# Altium PCB Copy of FullPCB.PcbDoc
Units mil, origin at the board's own origin, x right, y up, seen from the top; angles counter-clockwise.
Board outline 5050 x 1500 mil, 2 copper layers (Top Layer, Bottom Layer); 99 components, 55 nets, 255 pads, 49 vias.
Unrouted connection lines stored in the file: 4.
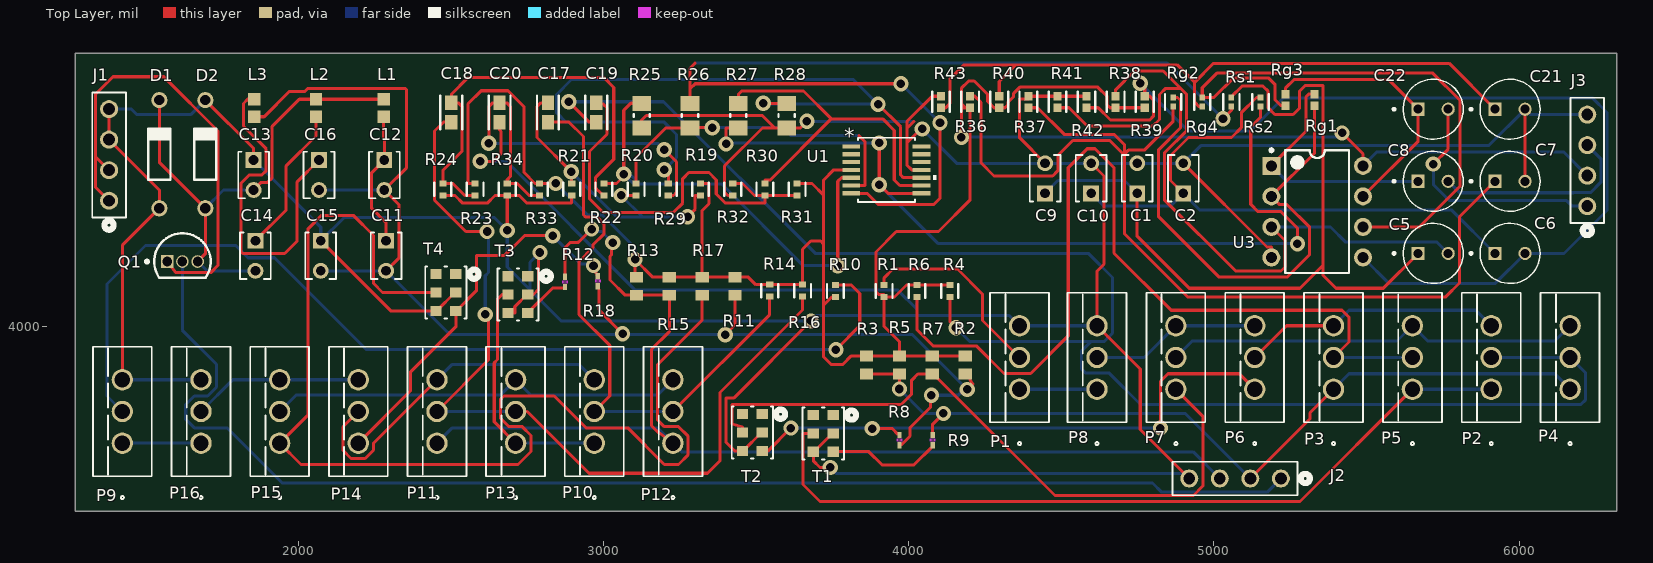
[diagram p0: Top Layer view]
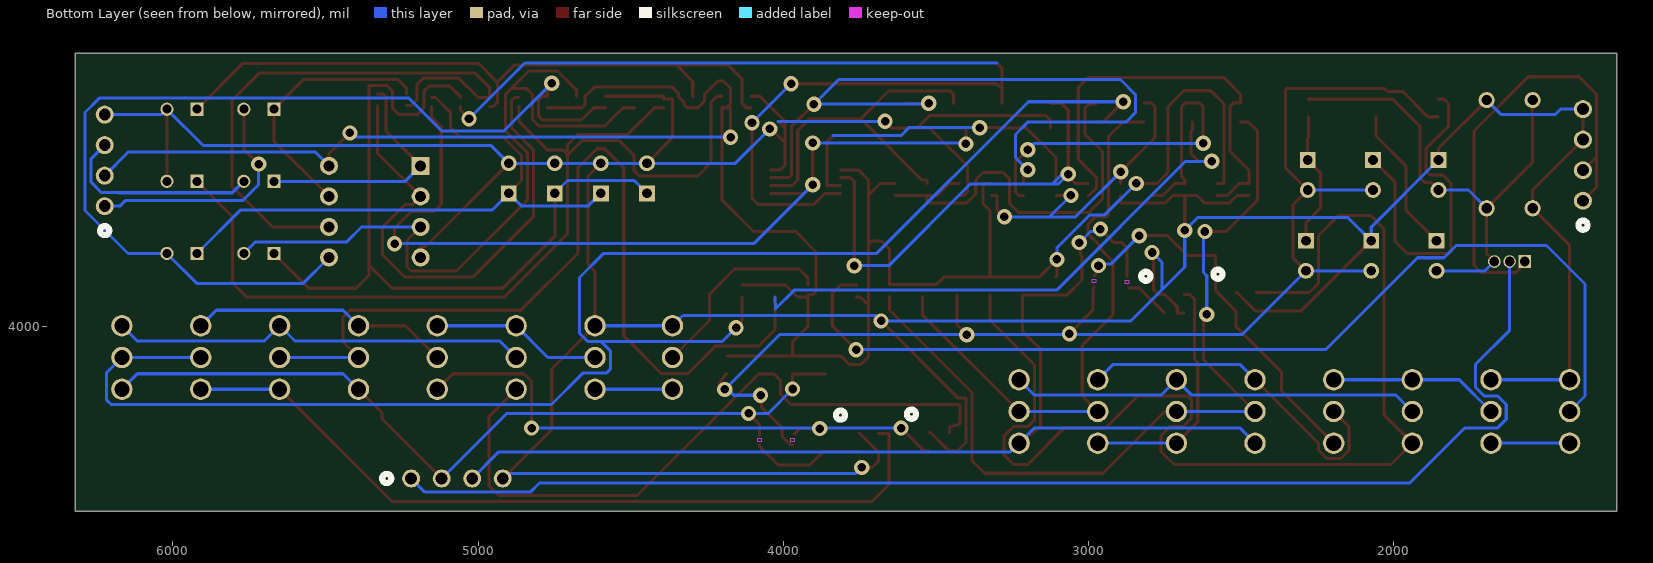
[diagram p1: Bottom Layer view, seen from below]

## Layer stack, top to bottom
Top Solder: solder mask 0.4, Solder Resist, Dk 3.5
Top Layer: signal copper 1.4
Dielectric 1: dielectric 12.6, FR-4, Dk 4.8
Bottom Layer: signal copper 1.4
Bottom Solder: solder mask 0.4, Solder Resist, Dk 3.5

## Board outline
1270,3395 1270,4895 6320,4895 6320,3395

## Design rules (kind name [scope] priority, off if disabled: settings)
Clearance [All] p1: gap=10 ignorepadtopadclearanceinfootprint=FALSE
PolygonConnect [All] p1: connectstyle=Relief reliefconductorwidth=10 reliefentries=4 polygonreliefangle="90 Angle" airgapwidth=10
RoutingVias [All] p1: holewidth=28 width=50 viastyle="Through Hole" minholewidth=28 minwidth=50 maxholewidth=28 maxwidth=50
SolderMaskExpansion [All] p1: expansion=4 istentingtop=FALSE
SupplyNets "Schematic Supply Nets" [InNet('GND')] p1: voltage=0.000
Width [All] p1: maxlimit=10 minlimit=10 preferedwidth=10
30 further rules are at their usual default settings.

## Classes and differential pairs
component class U_SeriesSwitch: Antenna Q1
component class "U_Quadrature Mixers": P1 P2 P3 P4 P5 P6 P7 P8 P9 P10 P11 P12 P13 P14 P15 P16 R1 R2 R3 R4 R5 R6 R7 R8 R9 R10 R11 R12 R13 R14 R15 R16 R17 R18 T1 T2 T3 T4
component class U_Limiter: D1 D2
component class "U_Differential Opamp": C17 C18 C19 C20 R19 R20 R21 R22 R23 R24 R25 R26 R27 R28 R29 R30 R31 R32 R33 R34 U1
component class U_Bandpass: *1 *2 *3 C11 C12 C13 C14 C15 C16 L1 L2 L3
component class "FULL HIERARCHICAL SCHEMATIC": J1 J2 J3
component class "U_Lowpass Amplifier": C1 C2 C5 C6 C7 C8 C9 C10 C21 C22 R36 R37 R38 R39 R40 R41 R42 R43 Rg1 Rg2 Rg3 Rg4 Rs1 Rs2 U3

## Components (designator, comment, footprint, x,y, rotation, side; value= is the part's Value field where it differs from the comment)
C1 "K103K10X7RF53L2" K103K10X7RF53L2_VIS 4749.02,4436.02 r90 top
C2 "K103K10X7RF53L2" K103K10X7RF53L2_VIS 4899.93,4436.02 r90 top
C5 "ECA1CM100I" CAPPRD250W50D500H1100 5718.5,4239.17 r0 top
C6 "ECA1CM100I" CAPPRD250W50D500H1100 5970.47,4239.17 r0 top
C7 "ECA1CM100I" CAPPRD250W50D500H1100 5970.47,4475.39 r0 top
C8 "ECA1CM100I" CAPPRD250W50D500H1100 5718.5,4475.39 r0 top
C9 "K103K10X7RF53L2" K103K10X7RF53L2_VIS 4447.18,4436.02 r90 top
C10 "K103K10X7RF53L2" K103K10X7RF53L2_VIS 4598.1,4436.02 r90 top
C11 "K103K10X7RF53L2" K103K10X7RF53L2_VIS 2288.39,4280.51 r270 top
C12 "K103K10X7RF53L2" K103K10X7RF53L2_VIS 2282.48,4545.28 r270 top
C13 "K103K10X7RF53L2" K103K10X7RF53L2_VIS 1854.33,4545.28 r270 top
C14 "K103K10X7RF53L2" K103K10X7RF53L2_VIS 1860.24,4280.51 r270 top
C15 "K103K10X7RF53L2" K103K10X7RF53L2_VIS 2074.31,4280.51 r270 top
C16 "K103K10X7RF53L2" K103K10X7RF53L2_VIS 2068.41,4545.28 r270 top
C17 "GRM188R60J106ME47D" FP-GRM188-0_1-e0_2_0_55-IPC_A 2818.39,4700.71 r90 top
C18 "GRM188R60J106ME47D" FP-GRM188-0_1-e0_2_0_55-IPC_A 2501.97,4700.71 r90 top
C19 "GRM188R60J106ME47D" FP-GRM188-0_1-e0_2_0_55-IPC_A 2976.59,4700.71 r90 top
C20 "GRM188R60J106ME47D" FP-GRM188-0_1-e0_2_0_55-IPC_A 2660.18,4700.71 r90 top
C21 "ECA1CM100I" CAPPRD250W50D500H1100 5970.47,4711.61 r0 top
C22 "ECA1CM100I" CAPPRD250W50D500H1100 5718.5,4711.61 r0 top
D1 "1N4148" NXP-SOD27-2_V 1545.59,4564.19 r90 top
D2 "1N4148" NXP-SOD27-2_V 1696.19,4564.19 r90 top
J1 "PRPC004SAAN-RC" CONN4_PRPC004_SUL 1380.91,4411.81 r270 top
J2 "PRPC004SAAN-RC" CONN4_PRPC004_SUL 5219.49,3501.97 r0 top
J3 "PRPC004SAAN-RC" CONN4_PRPC004_SUL 6223.43,4393.9 r270 top
L1 "BRC1608TR50M6" INDC1608X100N 2280.51,4715.55 r270 top
L2 "BRC1608TR50M6" INDC1608X100N 2059.06,4715.55 r90 top
L3 "BRC1608TR50M6" INDC1608X100N 1856.3,4715.55 r270 top
P1 "IRF9640PBF" TO220AB_VIS 4363.53,3794.29 r90 top
P2 "IRF9640PBF" TO220AB_VIS 5908.75,3794.29 r90 top
P3 "IRF9640PBF" TO220AB_VIS 5392.16,3794.29 r90 top
P4 "IRF9640PBF" TO220AB_VIS 6167.05,3794.29 r90 top
P5 "IRF9640PBF" TO220AB_VIS 5650.45,3794.29 r90 top
P6 "IRF9640PBF" TO220AB_VIS 5133.86,3794.29 r90 top
P7 "IRF9640PBF" TO220AB_VIS 4875.56,3794.29 r90 top
P8 "IRF9640PBF" TO220AB_VIS 4617.26,3794.29 r90 top
P9 "IRF9640PBF" TO220AB_VIS 1424.39,3617.52 r90 top
P10 "IRF9640PBF" TO220AB_VIS 2970.26,3617.52 r90 top
P11 "IRF9640PBF" TO220AB_VIS 2454.97,3617.52 r90 top
P12 "IRF9640PBF" TO220AB_VIS 3227.91,3617.52 r90 top
P13 "IRF9640PBF" TO220AB_VIS 2712.62,3617.52 r90 top
P14 "IRF9640PBF" TO220AB_VIS 2197.33,3617.52 r90 top
P15 "IRF9640PBF" TO220AB_VIS 1939.68,3617.52 r90 top
P16 "IRF9640PBF" TO220AB_VIS 1682.04,3617.52 r90 top
Q1 "BS170" ONSC-TO-92-3-29-11 1621.06,4212.6 r0 top
R1 "RMCF0402FT1K00" FP-RMCF0402-MFG 3919.89,4116.14 r90 top
R2 "RK73H1JTTD1002F" RESC1608X55X30ML20T10 4185.43,3874.02 r90 top
R3 "RK73H1JTTD1002F" RESC1608X55X30ML20T10 3862.41,3874.02 r90 top
R4 "RMCF0402FT1K00" FP-RMCF0402-MFG 4135.23,4116.14 r90 top
R5 "RK73H1JTTD1002F" RESC1608X55X30ML20T10 3970.08,3874.02 r90 top
R6 "RMCF0402FT1K00" FP-RMCF0402-MFG 4027.56,4116.14 r90 top
R7 "RK73H1JTTD1002F" RESC1608X55X30ML20T10 4077.76,3874.02 r90 top
R8 "TNPW020125R0BEED" RES_TNPW0201_VIS 3969.96,3627.89 r90 top
R9 "TNPW020125R0BEED" RES_TNPW0201_VIS 4078.74,3627.89 r90 top
R10 "RMCF0402FT1K00" FP-RMCF0402-MFG 3760.35,4116.14 r90 top
R11 "RK73H1JTTD1002F" RESC1608X55X30ML20T10 3431.49,4131.89 r90 top
R12 "TNPW020125R0BEED" RES_TNPW0201_VIS 2874.48,4145.63 r90 top
R13 "RK73H1JTTD1002F" RESC1608X55X30ML20T10 3108.47,4131.89 r90 top
R14 "RMCF0402FT1K00" FP-RMCF0402-MFG 3545.01,4117.13 r90 top
R15 "RK73H1JTTD1002F" RESC1608X55X30ML20T10 3216.15,4131.89 r90 top
R16 "RMCF0402FT1K00" FP-RMCF0402-MFG 3652.68,4117.13 r90 top
R17 "RK73H1JTTD1002F" RESC1608X55X30ML20T10 3323.82,4131.89 r90 top
R18 "TNPW020125R0BEED" RES_TNPW0201_VIS 2982.16,4148.39 r90 top
R19 "RMCF0402JT100K" FP-RMCF0402-MFG 3318.34,4448.82 r90 top
R20 "RMCF0402FT1K00" FP-RMCF0402-MFG 3107.34,4448.82 r90 top
R21 "RMCF0402JT100K" FP-RMCF0402-MFG 2896.34,4448.82 r90 top
R22 "RMCF0402FT1K00" FP-RMCF0402-MFG 3001.84,4448.82 r90 top
R23 "RMCF0402JT100K" FP-RMCF0402-MFG 2579.85,4448.82 r90 top
R24 "RMCF0402JT100K" FP-RMCF0402-MFG 2474.35,4448.82 r90 top
R25 "CRCW08055K00FKTA" RESC2013X50X30ML20T20 3125.77,4690.7 r90 top
R26 "CRCW08055K00FKTA" RESC2013X50X30ML20T20 3283.98,4690.7 r90 top
R27 "CRCW08055K00FKTA" RESC2013X50X30ML20T20 3442.18,4690.7 r90 top
R28 "CRCW08055K00FKTA" RESC2013X50X30ML20T20 3600.39,4690.7 r90 top
R29 "RMCF0402FT1K00" FP-RMCF0402-MFG 3212.84,4448.82 r90 top
R30 "RMCF0402FT1K00" FP-RMCF0402-MFG 3529.34,4448.82 r90 top
R31 "RMCF0402JT100K" FP-RMCF0402-MFG 3634.84,4448.82 r90 top
R32 "RMCF0402JT100K" FP-RMCF0402-MFG 3423.84,4448.82 r90 top
R33 "RMCF0402JT100K" FP-RMCF0402-MFG 2790.84,4448.82 r90 top
R34 "RMCF0402JT100K" FP-RMCF0402-MFG 2685.35,4448.82 r90 top
R36 "RC0402JR-07100KL" FP-RC0402-0_4-IPC_A 4201.65,4735.24 r90 top
R37 "RC0402JR-07100KL" FP-RC0402-0_4-IPC_A 4392.35,4735.24 r90 top
R38 "RC0402JR-07100KL" FP-RC0402-0_4-IPC_A 4678.4,4735.24 r90 top
R39 "RC0402JR-07100KL" FP-RC0402-0_4-IPC_A 4773.75,4735.24 r90 top
R40 "RC0402JR-07100KL" FP-RC0402-0_4-IPC_A 4297,4735.24 r90 top
R41 "RC0402JR-07100KL" FP-RC0402-0_4-IPC_A 4487.7,4735.24 r90 top
R42 "RC0402JR-07100KL" FP-RC0402-0_4-IPC_A 4583.05,4735.24 r90 top
R43 "RC0402JR-07100KL" FP-RC0402-0_4-IPC_A 4106.3,4735.24 r90 top
Rg1 "RC0402FR-07330KL" RESC1005X40X25ML05T10 5329.72,4742.13 r90 top
Rg2 "RC0402JR-0710KL" FP-RC0402-0_4-IPC_C 4866.69,4735.24 r90 top
Rg3 "RC0402FR-07330KL" RESC1005X40X25ML05T10 5234.37,4742.13 r90 top
Rg4 "RC0402JR-0710KL" FP-RC0402-0_4-IPC_C 4962.04,4735.24 r90 top
Rs1 "RC0402JR-0710KL" FP-RC0402-0_4-IPC_C 5057.39,4735.24 r90 top
Rs2 "RC0402JR-0710KL" FP-RC0402-0_4-IPC_C 5152.74,4735.24 r90 top
T1 "UWB1-85EC" UWB1UWB2_COC 3720.49,3649.57 r0 top
T2 "UWB1-85EC" UWB1UWB2_COC 3488.25,3652.56 r0 top
T3 "UWB1-85EC" UWB1UWB2_COC 2720.39,4104.41 r0 top
T4 "UWB1-85EC" UWB1UWB2_COC 2484.23,4111.22 r0 top
U1 "OPA4863PWR" PW14_TEX 3927.32,4512.8 r0 top
U3 "LT1638CN8#PBF" LT-N8-8 5338.58,4375.98 r0 top

## Footprints (in the part's own frame and the unit in brackets; to place one, negate y for a bottom-side part, rotate by r counter-clockwise, add the part's x,y. Pads: shape width x height; smd on the part's side, far side on the other; paste and mask are expansions set on the pad)
CAPPRD250W50D500H1100 [mm]
  round 1.1 hole 0.75: N(1.25,0)
  rect 1.1x1.1 hole 0.75: P(-1.25,0)
  silkscreen extent -3.35,-2.5 2.5,2.5, body extent -2.5,-2.5 2.5,2.5, height 11
CONN4_PRPC004_SUL [mil]
  round 59 / inner round 60 / far side round 59 hole 39 paste-99999 mask+0: 1(0,0) 2(-100,0) 3(-200,0) 4(-300,0)
  silkscreen extent -355,-55 95,55
FP-GRM188-0_1-e0_2_0_55-IPC_A [mil]
  rect 47.57x39.85 smd paste+0 mask+0: 1(-31.57,0) 2(31.57,0)
  silkscreen extent -55,-36 55,36, body extent -75,-40 75,40, height 10
FP-RC0402-0_4-IPC_A [mil]
  rect 28.16x26.48 smd paste+0 mask+0: 1(-18.84,0) 2(18.84,0)
  silkscreen extent -33,-29 33,29, body extent -41,-21 41,21, height 10
FP-RC0402-0_4-IPC_C [mil]
  rect 20.29x18.6 smd paste+0 mask+0: 1(-14.9,0) 2(14.9,0)
  silkscreen extent -25,-27 25,27, body extent -29,-15 29,15, height 10
FP-RMCF0402-MFG [mm]
  rect 0.5x0.6 smd paste+0 mask+0: 1(-0.5,0) 2(0.5,0)
  silkscreen extent -0.55,-0.7 0.55,0.7, body extent -0.85,-0.4 0.85,0.4, height 0.25
INDC1608X100N [mm]
  rect 1.06x1.02 smd: 1(-0.728,0) 2(0.728,0)
K103K10X7RF53L2_VIS [mil]
  rect 52x52 / inner round 60 / far side rect 52x52 hole 32 paste-99999 mask+0: 1(0,0)
  round 52 / inner round 60 / far side round 52 hole 32 paste-99999 mask+0: 2(98.42,0)
  silkscreen extent -27,-51 125,50, body extent -33,-46 109,46, height 142
LT-N8-8 [mm] "DIP, 8-Leads, Body 10.16x6.48mm, Pitch 2.54mm"
  rect 1.5x1.5 hole 0.9: 1(-3.81,3.81)
  round 1.5 hole 0.9: 2(-3.81,1.27) 3(-3.81,-1.27) 4(-3.81,-3.81) 5(3.81,-3.81) 6(3.81,-1.27) 7(3.81,1.27) 8(3.81,3.81)
  silkscreen extent -3.93,-5.1 2.65,5.23, body extent -3.95,-5.07 3.95,5.07, height 3.94
NXP-SOD27-2_V [mm] "SOD27, 2-Leads, Dia 1.85mm, Body Length 4.25mm, Pin Spacing 9mm"
  round 1.35 hole 0.85: 1(-4.5,0) 2(4.5,0)
  silkscreen extent -2.12,-0.93 2.12,0.92, body extent -4.78,-0.92 4.78,0.92, height 1.84
ONSC-TO-92-3-29-11 [mm] "TO, 3-Leads, Body Dia 4.7mm, Pitch 1.27mm"
  rect 1.05x1.05 hole 0.8: 1(-1.27,0)
  round 1.05 hole 0.8: 2(0,0) 3(1.27,0)
  silkscreen extent -3.07,-1.34 2.35,2.35, body extent -2.35,-1.33 2.36,2.36, height 7.87
PW14_TEX [mil]
  rect 58x14 smd paste+0 mask+0: 1(-115,76.77) 2(-115,51.18) 3(-115,25.59) 4(-115,0) 5(-115,-25.59) 6(-115,-51.18) 7(-115,-76.77) 8(115,-76.77) 9(115,-51.18) 10(115,-25.59) 11(115,0) 12(115,25.59) 13(115,51.18) 14(115,76.77)
  silkscreen extent -94,-105 164,106, body extent -130,-101 130,101, height 47
RES_TNPW0201_VIS [mil]
  rect 21x14 smd paste+0 mask+0: 1(-16.5,0) 2(16.5,0)
  Top Layer keep-out region: -4,-5 -4,5 4,5 4,-5
  Keep-Out Layer region: -4,-7 -4,7 4,7 4,-7
  body extent -13,-7 13,7, height 10
RESC1005X40X25ML05T10 [mm] "Chip Resistor, 2-Leads, Body 1.00x0.50mm, IPC Low Density"
  rect 0.7x0.65 smd: 1(-0.475,0) 2(0.475,0)
  body extent -0.53,-0.27 0.53,0.28, height 0.4
RESC1608X55X30ML20T10 [mm] "Chip Resistor, 2-Leads, Body 1.60x0.80mm, IPC Low Density"
  rect 0.9x1.1 smd: 1(-0.75,0) 2(0.75,0)
  body extent -0.9,-0.5 0.9,0.5, height 0.55
RESC2013X50X30ML20T20 [mm] "Chip Resistor, 2-Leads, Body 2.00x1.25mm, IPC Low Density"
  rect 1.25x1.55 smd: 1(-1.025,0) 2(1.025,0)
  silkscreen extent -0.1,-0.67 0.1,0.67, body extent -1.1,-0.72 1.1,0.72, height 0.5
TO220AB_VIS [mil]
  round 70 / inner round 60 / far side round 70 hole 50 paste-99999 mask+0: 1(0,0) 2(103.94,0) 3(207.87,0)
  silkscreen extent -183,-96 316,97, body extent -103,-91 311,91, height 600
UWB1UWB2_COC [mil]
  rect 37x33 smd paste+0 mask+0: 1(32.5,60) 2(32.5,0) 3(32.5,-60) 4(-32.5,-60) 5(-32.5,0) 6(-32.5,60)
  silkscreen extent -68,-85 108,85

## Part data
C1 C2 C9 C10 C11 C12 C13 C14 C15 C16 P1 P2 P3 P4 P5 P6 P7 P8 P9 P10 P11 P12 P13 P14 P15 P16: "No Description Available", Mfr_Name=Vishay
  C1 C2 C9 C10 C11 C12 C13 C14 C15 C16: Type="Ceramic Capacitor"
C5 C6 C7 C8 C21 C22: "10ÂµF 16V Aluminum Electrolytic Capacitors Radial, Can 2000 Hrs @ 85Â°C", Package="RADIAL-2 Panasonic", Check_prices=https://www.snapeda.com/parts/ECA1CM100I/Panasonic/view-part/?ref=eda, Digi-Key_Part_Number=P19513TB-ND, MF=Panasonic, MP=ECA1CM100I, SnapEDA_Link=https://www.snapeda.com/parts/ECA1CM100I/Panasonic/view-part/?ref=snap
C17 C18 C19 C20: library part CMP-2006-02792-2, "Chip Multilayer Ceramic Capacitors for General Purpose, 0603, 10uF, X5R, 15%, 20%, 6.3V", Capacitance=10uF, Case Code (Imperial)=0603, Case Code (Metric)=1608, Dielectric=X5R, Max Operating Temperature=85°C, Min Operating Temperature=-55°C, Package Quantity=4000, Tolerance=20%, Voltage=6.3V, Case/Package=0603, Depth=0.8mm, Height=0.8mm, Lead Free="Lead Free", Length=1.6mm, Material=Ceramic, Mount="Surface Mount", Packaging="Tape and Reel", Radiation Hardening=No, REACH SVHC="No SVHC", Termination=SMD/SMT, Thickness=0.035inch, Voltage Rating=6.3V, Voltage Rating (DC)=6.3V, Width=0.031inch
D1 D2: library part CMP-0648-00002-1, "High-speed Diode, 100 V, 450 mA, 2-Pin SOD27, RoHS", Manufacturer="NXP Semiconductors", Cd="4 pF Max.", ComponentLink1Description="Manufacturer URL", ComponentLink1URL=http://www.nxp.com/, ComponentLink2Description=Datasheet, ComponentLink2URL=http://www.nxp.com/documents/data_sheet/1N4148_1N4448.pdf, ComponentLink3Description="Package Specification", ComponentLink3URL=http://www.nxp.com/documents/data_sheet/1N4148_1N4448.pdf, Configuration=Single, DatasheetVersion=Aug-04, IF="200 mA Max.", IFRM="450 mA", IFSM="4 A Max.", IR (VR="20 V)=25 nA", Mounting Technology="Through Hole", PackageDescription="2-Pin Hermetically Sealed Glass Package, Axial Leaded, Dia 1.85 mm, Body Length 4.25 mm, Lead Spread 25.4 mm", PackageReference=SOD27, PackageVersion=Aug-04, PartNumber=1N4148, RoHS=TRUE, Trr="4 ns Max.", VF (IF="10 mA)=1 V", VR="100 V Max."
J1 J2 J3: "No Description Available", Mfr_Name=Sullins, RefDes=RefDes, Type="Headers, Male Pins"
L1 L2 L3: "Inductor Power Chip Wirewound 500nH 20% 6MHz Ferrite 1.05A 117mOhm DCR 0603 T/R", Package=None, Availability=Unavailable, MP=BRC1608TR50M6, Price=None
Q1: library part CMP-1058-00929-1, "Small Signal MOSFET, 500 mA, 60 V, N-Channel, 3-Pin TO-92, Bulk Box", Manufacturer="On Semiconductor", Package Type=TO-92, Channel Polarity="N Channel", ComponentLink1Description="Manufacturer URL", ComponentLink1URL=http://www.onsemi.com/, ComponentLink2Description=Datasheet, ComponentLink2URL=http://www.onsemi.com/pub_link/Collateral/BS170-D.PDF, ComponentLink3Description="Package Specification", ComponentLink3URL=http://www.onsemi.cn/pub_link/Collateral/2N6426-D.PDF, Configuration=Single, DatasheetVersion="Rev. 6", ID Max (A)=0.5, Mounting Technology="Through Hole", PackageDescription="3-Pin Transistor Outline, Body 4.825 x 3.685 mm, Pitch 1.27 mm", PackageReference=TO-92-3-29-11_AM_SL, PackageVersion="Rev. AM", Packing="Bulk Box", PartNumber=BS170, PD Max (W)=0.35, V(BR)DSS Min (V)=60, VGS Max (V)=20, VGS(th) Max (V)=3
R1 R4 R6 R10 R14 R16 R20 R22 R29 R30: library part CMP-26527-000026-1, "1kΩ ±1% 0.063W 0402 Thick Film Chip Resistor AEC-Q200 compliant", Case Code (Imperial)=0402, Case Code (Metric)=1005, Max Operating Temperature=155°C, Max Power Dissipation=63mW, Min Operating Temperature=-55°C, Resistance=1kR, Resistor Type="Thick Film", Temperature Coefficient=100ppm/°C, Tolerance=1%, Case/Package=0402, Construction=Rectangular, Contact Plating=Tin, Depth=0.5mm, Features="Automotive AEC-Q200", Height=0.016inch, Lead Free="Lead Free", Length=1mm, Military Standard=Not, Mount="Surface Mount", Number of Terminations=2, Packaging="Tape and Reel", Power Rating=63mW, Radiation Hardening=No, RoHS Compliant=Yes, Series=RMCF, Size Code=0402, Width=0.02inch
R2 R3 R5 R7 R11 R13 R15 R17: library part CMP-2000-01099-1, Manufacturer="KOA Speer", Part Number=RK73H1JTTD1002F
R8 R9 R12 R18: "RES 25 OHM 0.1% 0.075W 0201", Mfr_Name=Vishay
R19 R21 R23 R24 R31 R32 R33 R34: library part CMP-26527-006953-1, "100kΩ ±5% 0.063W 0402 Thick Film Chip Resistor AEC-Q200 compliant", Case Code (Imperial)=0402, Case Code (Metric)=1005, Max Operating Temperature=155°C, Max Power Dissipation=63mW, Min Operating Temperature=-55°C, Power Rating=62.5mW, Resistance=100kR, Resistor Type="Thick Film", Temperature Coefficient=100ppm/°C, Tolerance=5%, Working Voltage=50V, Case/Package=0402, Construction=Rectangular, Contact Plating=Tin, Depth=0.5mm, Features="Automotive AEC-Q200", Height=0.016inch, Lead Free="Lead Free", Length=1mm, Military Standard=Not, Mount="Surface Mount", Number of Terminations=2, Packaging="Tape and Reel", Radiation Hardening=No, RoHS Compliant=Yes, Series=RMCF, Technology="THICK FILM", Width=0.02inch
R25 R26 R27 R28: library part CMP-2001-04239-1, Manufacturer="Vishay Dale", Part Number=CRCW08055K00FKTA
R36 R37 R38 R39 R40 R41 R42 R43: library part CMP-2002-07913-2, "RES 100K OHM 5% 1/16W 0402", Case Code (Imperial)=0402, Case Code (Metric)=1005, Max Operating Temperature=155°C, Max Power Dissipation=63mW, Min Operating Temperature=-55°C, Package Quantity=1, Resistance=100kR, Resistance Tolerance=5%, Resistor Type="Thick Film", Temperature Coefficient=100ppm/°C, Voltage Rating=50V, Case/Package=0402, Construction=Rectangular, Depth=0.5mm, Features="Moisture Resistant", Height=0.016inch, Lead Free="Lead Free", Length=1mm, Military Standard=Not, Number of Terminations=2, Packaging="Tape and Reel", Power Rating=63mW, RoHS Compliant=Yes, Series=RC, Size Code=0402, Termination=SMD/SMT, Tolerance=5%, Width=0.02inch
Rg1 Rg3: library part CMP-2002-07612-1, Manufacturer="Yageo / Phycomp", Part Number=RC0402FR-07330KL
Rg2 Rg4 Rs1 Rs2: library part CMP-2002-07915-3, "RES 10K OHM 5% 1/16W 0402", Case Code (Imperial)=0402, Case Code (Metric)=1005, Max Operating Temperature=155°C, Max Power Dissipation=63mW, Min Operating Temperature=-55°C, Package Quantity=1, Power Rating=62.5mW, Resistance=10kR, Resistance Tolerance=5%, Resistor Type="Thick Film", Temperature Coefficient=100ppm/°C, Voltage Rating=50V, Case/Package=0402, Construction=Rectangular, Depth=0.5mm, Features="Moisture Resistant", Height=0.016inch, Lead Free="Lead Free", Length=0.039inch, Military Standard=Not, Number of Terminations=2, Packaging="Tape and Reel", RoHS Compliant=Yes, Series=RC, Size Code=0402, Termination=SMD/SMT, Tolerance=5%, Width=0.02inch
T1 T2 T3 T4: "• 3 dB bandwidth: 1 MHz to 8.5 GHz • 1/4 Watt RF input power • 250 mA max current rating • AEC-Q200 Grade 1 (–40°C to +125°C)", Mfr_Name=Coilcraft, RefDes=RefDes, Type=Type
U1: "No Description Available", Mfr_Name="Texas Instruments", RefDes=RefDes, Type=Linear
U3: library part CMP-0359-01111-2, "Dual Channel, High Voltage, Micropower Rail-to-Rail Operational Amplifier, 1.2 MHz Typical GBW, 0.38 V/us Typical SR, 2.2 to 44 V, 8-Pin DIP (N8-8), Commercial, Pb-Free", Linear Technology Part Number=LT1638, Manufacturer="Linear Technology", Channels (#)=2, ComponentLink1Description="Manufacturer URL", ComponentLink1URL=http://www.linear.com/, ComponentLink2Description=Datasheet, ComponentLink2URL=http://cds.linear.com/docs/en/datasheet/16389fg.pdf, ComponentLink3Description="Package Specification", ComponentLink3URL=http://cds.linear.com/docs/en/packaging/05081510_I_N8.pdf, DatasheetVersion="Rev. G", GBW (MHz) Typical=1.2, Is (mA) Typical=0.17, Mounting Technology="Surface Mount", PackageDescription="8-Lead PDIP, Body 10.16 x 6.48 mm, Pitch 2.54 mm", PackageReference=LT-N8-8, PackageVersion="Rev I", PartNumber=LT1638CN8#PBF, RevisionNote="URLs updated", RoHS=Pb-Free, SR (V/us) Typical=0.38, Type=VFB, Vos (mV) Guaranteed=0.6, Vos (mV) Typical=0.2, Vs Max (V)=44, Vs Min (V)=2.2

## Via types
v1: diameter 50, hole 28, Top Layer to Bottom Layer, 49 vias

## Nets (pads, with @x,y where several pads share a name; then routed paths per layer and width w, separated by ;. In a path a pad name is that pad's centre, name@x,y a point inside that pad or via, vN(x,y) a via of type N, cw(c..) or ccw(c..) an arc to the next point about the centre after c; other vN are vias at no path point)
5V: J3.2 R1.1 R2.2 R3.2 R4.2 R5.2 R6.2 R7.2 R10.1 R11.2 R13.2 R14.2 R15.2 R16.2 R17.2 R19.2 R23.2 R31.2 R33.2 R36.1 R38.1 R39.1 R40.1 U1.4 U3.8 | length 8152.3
  Top Layer w10: R23.2 2557,4468.5 2557,4729 2600,4772 2688,4772 2740,4720 2740,4505 2776.5,4468.5 R33.2 v1(2844.5,4468.5) ; R13.2 3104,4165.89 v1(3104,4219.42) 3162,4161.42 R15.2 R17.2 ; R19.2 3346,4468.5 3346,4402.18 3323.82,4380 R17.2 ; R31.2 3683.5,4468.5 3722,4430 ; R10.1 3748.46,4096.46 3722,4070 ; U1.4 3754.8,4512.8 3722,4480 3722,4430 ; R4.2 R6.2 3993.37,4135.83 3954,4096.46 R1.1 ; v1(4173,4620) 4173,4716.4 4186.6,4716.4 ; R2.2 R7.2 R5.2 ; R39.1 R38.1 4660,4716.4 4649.29,4727.1 4649.29,4754.71 4620,4784 4364.55,4784 4344.11,4763.56 4344.11,4753.11 4325,4734 4325,4725.4 4316,4716.4 R40.1 4280,4716.4 4259,4737.4 4259,4760 4215,4804 4197,4804 4173,4780 4173,4730 4186.6,4716.4 ; v1(5420,4634) 5488.58,4565.42 U3.8 ; R17.2 R11.2 3475,4161.42 3499.61,4136.81 R14.2 R16.2 3652.68,4252.36 3680,4279.68 3712,4279.68 3722,4269.68 ; 3722,4070 3722,3900 3746,3876 3785,3876 3812.54,3903.54 R3.2 R5.2 ; 3722,4070 3722,4269.68 ; 3722,4269.68 3722,4430 ; R1.1 3919.89,4000 3970.08,3949.8 R5.2 ; R1.1 3919.89,4104 3903,4104 3893.08,4113.92 3893.08,4244.08 3960,4311 4098,4311 4201.65,4414.65 R36.1 4186.6,4716.4
  Bottom Layer w10: v1(2844.5,4468.5) 2948.59,4364.41 2997.34,4364.41 3104,4257.74 v1(3104,4219.42) v1@3104,4209 ; v1(4173,4620) 5406,4620 v1(5420,4634) ; U3.8 5534.65,4572.05 6145.28,4572.05 J3.2
GND: C1.2 C2.2 C7.N C9.2 C10.2 C13.1 C15.1 C21.N D1.1 D2.2 J1.3 J1.4 J2.4 J3.4 P1.3 P8.3 P9.3 P16.3 R21.1 R24.1 R25.1 R28.1 R32.1 R34.1 R37.2 R41.2 R42.2 R43.2 T1.2 T1.4 T2.2 T2.4 T3.2 T3.4 T4.2 T4.4 U1.11 U3.4 | length 15015.4
  Top Layer w10: J1.4 J1.3 1545.59,4447.13 D1.1 1424.39,4265.83 P9.3 ; D2.2 1854.33,4583.21 C13.1 ; C15.1 2303.6,4051.22 T4.4 2454,4051.22 2514,4111.22 T4.2 ; R24.1 2513.87,4429.13 2539,4404 2619.87,4404 2645,4429.13 R34.1 ; v1(2685.35,4314.65) R34.1 ; T3.4 2709.81,4044.41 2709.81,4064.22 2750,4104.41 T3.2 2771.41,4104.41 2787,4120 2787,4236.8 v1(2792.32,4242.13) ; R21.1 2896.34,4404 2750,4404 2724.87,4429.13 R34.1 ; R25.1 3125.77,4676 3140.77,4691 3521,4691 3561.66,4650.34 ; R32.1 3407.87,4429.13 3397,4440 3397,4526 3521.34,4650.34 3561.66,4650.34 ; T2.2 3518,3652.56 3458,3592.56 T2.4 3429.69,3592.56 3402.25,3620 3402.25,3765 3427,3765 v1(3680,4018) ; v1(3667,4672) 3645.34,4650.34 R28.1 3561.66,4650.34 ; v1(3743,3538) 3709.99,3538 3687.99,3560 T1.4 3690,3589.57 3750,3649.57 T1.2 ; 4018,4672 3994.96,4648.96 ; U1.11 4010,4512.8 3994.96,4527.83 3994.96,4601.85 ; v1(4045.11,4646.89) 4040,4646.89 3994.96,4601.85 ; R43.2 4077.08,4754.08 3994.96,4671.96 3994.96,4648.96 ; C9.2 4364,4617.63 4364,4745.48 4392.35,4745.48 R37.2 R41.2 R42.2 ; C10.2 4640,4492.55 4640,4204 4617.26,4181.26 P8.3 4759,3860.43 4759,3662.46 J2.4 ; C2.2 5174.38,4260 5188.58,4260 U3.4 ; C7.N C21.N ; 3994.96,4601.85 3994.96,4648.96
  Bottom Layer w10: J1.4 1454.19,4711.81 1471,4695 1649.83,4695 D2.2 ; P9.3 P16.3 ; C13.1 2074.31,4325.29 C15.1 2150.8,4357 2643,4357 v1(2685.35,4314.65) 2685.35,4194.65 2760,4120 ; v1(2792.32,4242.13) 2760,4209.8 2760,4120 ; v1(3667,4672) 4018,4672 ; v1(3743,3538) 3763,3518 4919.49,3518 J2.4 ; v1(4045.11,4646.89) 4157.55,4534.45 C9.2 C10.2 C1.2 C2.2 4958.92,4593.43 5901.5,4593.43 C21.N 6037.4,4693.9 J3.4 ; P8.3 P1.3 4329.69,4036 3698,4036 v1(3680,4018) 2862,4018 2760,4120
LO_F1_90: J2.2 P3.1 P4.1 R3.1 R5.1 R9.2 | length 2735.4
  Top Layer w10: R3.1 R5.1 v1(3970.08,3795) ; R9.2 4078.74,3679.57 v1(4114.17,3715) ; J2.2 5315,3697.48 5315,3717.14 P3.1
  Bottom Layer w10: v1(3970.08,3795) 4050.08,3715 v1(4114.17,3715) 4906.46,3715 J2.2 ; P3.1 5442.86,3845 6116.34,3845 P4.1
LO_FI_0: J2.3 P11.1 P12.1 R12.2 R13.1 R15.1 | length 3832.3
  Top Layer w10: R12.2 2874.48,4257.36 2892.58,4275.46 2918.11,4275.46 2925.77,4283.11 v1(2961.54,4318.88) ; v1(3030.48,4274.7) 3027.06,4271.29 3027.06,4234.7 3022.06,4229.7 3022.06,4152.12 3071.82,4102.36 R13.1 R15.1 3216.15,3983 3157.91,3924.76 3157.91,3674.75 3180,3652.66 P12.1
  Bottom Layer w10: P11.1 2505.45,3668 3177.43,3668 P12.1 3256.43,3589 4932.46,3589 J2.3 ; v1(2961.54,4318.88) 2969.19,4311.23 2993.94,4311.23 v1(3030.48,4274.7)
Low_Pass_0Deg: C5.N R38.2 R41.1 U3.3 | length 2476.4
  Top Layer w10: R41.1 4525.73,4716.4 4586.06,4656.07 4800,4656.07 4821.99,4678.06 4821.99,4760 4841.99,4780 4891,4780 ; R38.2 4678.4,4775.4 4740,4837 4834,4837 4891,4780 ; U3.3 5233.11,4281.46 5233.11,4194.57 5220,4181.46 5071.54,4181.46 4838,4415 4838,4568.29 4911,4641.29 4911,4760 4891,4780
  Bottom Layer w10: U3.3 5382.02,4325.98 5432,4276 5730.89,4276 C5.N
Low_Pass_90Deg: C6.N R39.2 R42.1 U3.5 | length 3291.3
  Top Layer w10: R42.1 4620.92,4716.4 4661.25,4676.07 4790,4676.07 4801.99,4688.06 4801.99,4742.09 4790,4754.08 R39.2 4773.75,4782.25 v1(4759,4797)
  Bottom Layer w10: v1(4759,4797) 4916,4640 5119,4640 5228,4749 6240,4749 6287.93,4701.07 6287.93,4379.93 6147.17,4239.17 C6.N 5920.51,4140 5574.57,4140 U3.5
NetC1_1: C1.1 C5.P C9.1 Rs1.2 | length 2645.5
  Top Layer w10: C1.1 4749.02,4294.98 4919,4125 5282.52,4125 5357.52,4200 ; Rs1.2 5057.39,4752.39 5092,4787 5161,4787 5178,4770 5178,4716 5200,4694 5260,4694 5280,4714 5280,4769.61 5300,4789.61 5357.52,4789.61 5357.52,4200 ; C5.P 5555.12,4125 5400,4125 5357.52,4167.48 5357.52,4200
  Bottom Layer w10: C9.1 4489.15,4478 4707.04,4478 C1.1
NetC2_1: C2.1 C6.P C10.1 Rs2.2 | length 1982.2
  Top Layer w10: C2.1 4858,4477.96 4858,4560 4916.94,4618.94 5057.77,4618.94 5090,4651.17 5090,4700.14 5140,4750.14 Rs2.2
  Bottom Layer w10: C10.1 4639.12,4395 4858.91,4395 C2.1 4954.96,4381 5779.43,4381 C6.P
NetC7_P: C7.P R36.2 R37.1 Rg2.1 | length 3319.4
  Top Layer w10: R36.2 4216.92,4754.08 4237,4734 4237,4536 4280,4493 4472,4493 4489,4510 4489,4560 4538,4609 4659,4609 4708,4560 ; R37.1 4422.6,4716.4 4509.69,4629.31 4673,4629.31 4708,4594.31 4708,4565.31 ; Rg2.1 4866.69,4672.02 4771.99,4577.31 4720,4577.31 4708,4565.31 ; C7.P 5805,4359.13 5805,4142 5760,4097 4914,4097 4708,4303 4708,4560 ; 4708,4560 4708,4565.31
NetC8_P: C8.P Rg1.2 U3.1 | length 806.2
  Top Layer w10: U3.1 5301.93,4639.33 5301.93,4752.21 5310.55,4760.83 Rg1.2
  Bottom Layer w10: U3.1 5239.17,4475.39 C8.P
NetC11_1: C11.1 C12.1 L1.2 | length 444
  Top Layer w10: L1.2 2280.51,4616.97 2282.48,4615 C12.1 2241,4503.8 2241,4387 2288.39,4339.61 C11.1
NetC11_2: C11.2 C12.2 C15.2 C16.2 L3.2 R2.1 R8.1 R11.1 R18.1 | length 4428.3
  Top Layer w10: L3.2 1889,4686.89 1972.11,4770 2022.69,4770 2032.76,4780.08 2349.76,4780.08 2355.61,4774.22 2355.61,4519.98 C12.2 2330,4399.33 2330,4223.7 C11.2 ; R18.1 2982.16,4128.39 2984.16,4126.39 2984.16,4122.14 2985.77,4120.53 2985.77,4055.57 2986.22,4055.12 2986.22,4053.15 v1(3062.99,3976.38) ; v1(3399.49,3973) 3431.49,4005 R11.1 ; R8.1 3977.67,3613.39 4004.78,3640.49 4004.78,3668.16 4071.22,3734.61 4071.22,3771.02 v1(4074.8,3774.61) ; R2.1 4189.37,3844.49 4210.75,3811.75 v1(4192.5,3793.5)
  Bottom Layer w10: C16.2 C12.2 ; C15.2 C11.2 2497.47,3973 v1(3399.49,3973) 4013,3973 v1(4192.5,3793.5) 4181.68,3793.5 4162.78,3774.61 v1(4074.8,3774.61)
NetC13_2: C13.2 C14.2 D1.2 D2.1 L1.1 L2.2 Q1.3 | length 1634.1
  Top Layer w10: D1.2 1545.59,4537.62 D2.1 1696.19,4237.72 Q1.3 ; C13.2 1879.42,4471.94 1900,4471.94 1915.33,4487.27 1915.33,4655.33 2004.21,4744.21 L2.2 L1.1
  Bottom Layer w10: Q1.3 1701.58,4182.09 C14.2 ; D2.1 1756.01,4446.85 C13.2
NetC14_1: C14.1 L2.1 | length 488.7
  Top Layer w10: C14.1 1961,4381.28 1961,4525.94 2059.06,4624 L2.1
NetC16_1: C16.1 L3.1 | length 1113.6
  Top Layer w10: L3.1 1835.21,4744.21 1821,4730 1821,4656 1895.33,4581.67 1895.33,4510 1881.33,4496 1840,4496 1813,4469 1813,4245 1819,4239 1956,4239 1997,4280 1997,4473.87 C16.1
NetC17_1: C17.1 P10.2 P12.2 R14.1 | length 1947.4
  Top Layer w10: C17.1 2887.86,4669.14 2935.03,4621.97 2935.03,4364.74 2940.89,4358.88 2978.11,4358.88 3001.54,4335.45 3001.54,4302.32 2965.77,4266.54 2965.77,4258.09 2920.28,4212.6 2920.28,4038.73 3021,3938 3021,3772.19 P10.2 ; P12.2 3545.01,4038.55 R14.1
  Bottom Layer w10: P10.2 P12.2
NetC17_2: C17.2 R19.1 R20.1 R21.2 | length 1027.5
  Top Layer w10: C17.2 2795.28,4732.28 2783,4720 2783,4619 v1(2895,4507) 2896.34,4505.66 R21.2 ; v1(3058.13,4429.13) R20.1 ; v1(3276,4359) 3301,4384 3301,4429.13 R19.1
  Bottom Layer w10: v1(2895,4507) 3043,4359 3128.27,4359 ; v1(3058.13,4429.13) 3128.27,4359 ; v1(3276,4359) 3128.27,4359
NetC18_1: C18.1 P11.2 P13.2 R16.1 | length 2856.2
  Top Layer w10: P11.2 2624.02,3890.5 2624.02,4028.54 v1(2613.19,4039.37) ; C18.1 2476.14,4669.14 2447,4640 2447,4413.61 2549.59,4311.02 v1(2619.09,4311.02) ; P13.2 2750.46,3721.46 2952.91,3519 3341.25,3519 3382.25,3560 3382.25,3783.48 3652.68,4053.91 R16.1
  Bottom Layer w10: P11.2 P13.2 ; v1(2613.19,4039.37) 2613.19,4165.96 2624.02,4176.78 2624.02,4306.1 v1(2619.09,4311.02)
NetC18_2: C18.2 R22.1 R23.1 R24.2 | length 1427.5
  Top Layer w10: R23.1 2546.37,4429.13 2507,4468.5 R24.2 2474.35,4511 2537,4573.65 2537,4720 2524.72,4732.28 C18.2 2501.97,4760 2557.97,4816 3001,4816 3034.11,4782.89 3034.11,4547.45 2975.03,4488.38 2975.03,4452.45 2983.82,4443.66 2985.35,4443.66 2999.88,4429.13 R22.1
NetC19_1: C19.1 P2.2 P4.2 R4.1 | length 5196.8
  Top Layer w10: v1(2887,4736) 2953.86,4669.14 C19.1 ; R4.1 4135.23,4016 v1(4155.23,3996)
  Bottom Layer w10: v1(2887,4736) 3197.26,4736 3693.95,4239.3 4588.7,4239.3 4668,4160 4668,3978 4640,3950 4597,3950 ; v1(4155.23,3996) 4201.23,3950 4597,3950 ; P2.2 P4.2 6218,3847.28 6218,3760 6202,3744 4760,3744 4656,3848 4579,3848 4567,3860 4567,3920 4597,3950
NetC19_2: C19.2 R30.1 R31.1 R32.2 | length 1381.2
  Top Layer w10: C19.2 2976.59,4728 3000,4728 3012,4716 3012,4630 2955.03,4573.03 2955.03,4417.97 3000,4373 3229,4373 3260,4404 3260,4484 3280,4504 3346,4504 3370,4480 3370,4434 3400,4404 3529.34,4404 R30.1 ; R32.2 3456,4468.5 3495.37,4429.13 R30.1 ; R31.1 R30.1
NetC20_1: C20.1 P3.2 P5.2 R6.1 | length 4864.8
  Top Layer w10: v1(2597,4541) 2640,4541 2665,4566 2665,4639.18 2660.18,4644 C20.1 ; R6.1 4027.56,3988.7 4080,3936.26 4222.08,3936.26 4312.35,3846 4400,3846 4523,3969 4523,4520 4585,4582 4611,4582 4673,4520 4673,4240 4860,4053 5420,4053 5443,4030 5443,3949.07 P3.2
  Bottom Layer w10: v1(2597,4541) 2682.85,4541 3104.85,4119 3965,4119 4026,4058 4027.56,4096.46 ; P3.2 P5.2
NetC20_2: C20.2 R29.1 R33.1 R34.2 | length 1350.3
  Top Layer w10: v1(2625,4600) 2625,4720 2637.28,4732.28 C20.2 2683.72,4732.28 2696,4720 2696,4491.65 2685.35,4481 R34.2 2718,4468.5 2757.37,4429.13 R33.1 ; v1(3200,4579) 3240,4539 3240,4439.13 3230,4429.13 R29.1
  Bottom Layer w10: v1(2625,4600) 3179,4600 v1(3200,4579)
NetC21_P: C21.P R40.2 R43.1 Rg4.1 | length 2253.8
  Top Layer w10: R43.1 4121.4,4716.4 4135,4730 4135,4810 4182,4857 4351.5,4857 ; R40.2 4297,4802.5 4351.5,4857 ; Rg4.1 4950.67,4720.33 4937,4734 4937,4800 ; C21.P 5770.87,4862 4999,4862 4937,4800 ; 4351.5,4857 4880,4857 4937,4800
NetC22_P: C22.P Rg3.2 U3.7 | length 867.4
  Top Layer w10: Rg3.2 5234.37,4780 5263.98,4809.61 5571.3,4809.61 C22.P 5669.29,4606.69 U3.7
NetP1_1: P1.1 P8.1 | length 253.7
  Bottom Layer w10: P1.1 P8.1
NetP1_2: P1.2 R1.2 | length 649.3
  Top Layer w10: R1.2 3919.89,4159 3948.78,4187.89 4160.11,4187.89 4242.35,4105.65 4242.35,4019.4 P1.2
NetP2_1: P2.1 P5.1 T1.5 | length 2631.9
  Top Layer w10: T1.5 3654,3649.57 3654,3482 3709.82,3426.18 5282.34,3426.18 P5.1
  Bottom Layer w10: P5.1 P2.1
NetP2_3: P2.3 P3.3 P6.2 | length 860.1
  Top Layer w10: P6.2 5237.8,4002.17 P3.3
  Bottom Layer w10: P3.3 5442.99,4053 5857.92,4053 P2.3
NetP4_3: P4.3 P5.3 P7.2 | length 1376.1
  Bottom Layer w10: P7.2 4929.33,3952 5600.29,3952 P5.3 5700.62,3952 6116.88,3952 P4.3
NetP6_1: P6.1 R8.2 T2.3 | length 1920
  Top Layer w10: T2.3 3540,3592.56 v1(3614.44,3667) ; v1(3880.91,3665.35) 3946.49,3665.35 R8.2@3964.96,3646.89 ; v1(4825,3667) 4825,3820 4850,3845 5083.15,3845 P6.1
  Bottom Layer w10: v1(3614.44,3667) v1(4825,3667)
NetP6_3: P6.3 P7.3 P8.2 | length 559.6
  Bottom Layer w10: P8.2 4771.62,3898.23 P7.3 P6.3
NetP7_1: P7.1 R7.1 T2.5 | length 2257.5
  Top Layer w10: T2.5 3455.75,3670 3422.25,3681.06 3422.25,3744.06 3975.71,3744.06 4010.08,3778.43 4010.08,3824.06 4030.51,3844.49 R7.1 4081.23,3844.49 4479.53,3446.18 4933.18,3446.18 4964,3477 4964,3705.85 P7.1
NetP9_1: P9.1 P16.1 | length 257.6
  Bottom Layer w10: P9.1 P16.1
NetP9_2: P9.2 R10.2 | length 3327.3
  Top Layer w10: R10.2 3812.17,4135.83 3840,4108 3840,4002 v1(3762,3924)
  Bottom Layer w10: P9.2 1374,3771.85 1374,4139 1500,4265 1796,4265 1836,4225 1923,4225 2224,3924 v1(3762,3924)
NetP10_1: P10.1 P13.1 T3.5 | length 803.7
  Top Layer w10: T3.5 2668.41,4104.41 2653.19,4089.19 2653.19,3891.39 2642.62,3880.82 2642.62,3687.52 P13.1
  Bottom Layer w10: P13.1 P10.1
NetP10_3: P10.3 P11.3 P14.2 | length 1144.7
  Top Layer w10: P14.2 2147,3671.13 2147,3594 2173.48,3567.52 2220,3567.52 2247.33,3594.85 2247.33,3617.75 P11.3
  Bottom Layer w10: P11.3 2505.58,3876 2919.66,3876 P10.3
NetP12_3: P12.3 P13.3 P15.2 | length 1373
  Bottom Layer w10: P15.2 1993.23,3775 2662.23,3775 P13.3 2763.01,3775 3177.52,3775 P12.3
NetP14_1: P14.1 R18.2 T4.3 | length 1268.2
  Top Layer w10: P14.1 2367.99,3788.18 2367.99,3849.89 2516.73,3998.63 T4.3 2518.73,4051.22 2584.02,4116.5 2584.02,4232.91 2677.17,4232.91 2741.5,4297.24 v1(2834.65,4297.24) ; v1(2967.84,4199.44) 2975.5,4191.79 2975.5,4175.05 2980.16,4170.39 2980.16,4166.89 R18.2
  Bottom Layer w10: v1(2834.65,4297.24) 2927.84,4204.05 2963.24,4204.05 v1(2967.84,4199.44)
NetP14_3: P14.3 P15.3 P16.2 | length 558.3
  Bottom Layer w10: P16.2 1785.97,3825.39 P15.3 P14.3
NetP15_1: P15.1 R17.1 T4.5 | length 3859.6
  Top Layer w10: T4.5 2276.78,4111.22 2247,4141 2247,4298 2181,4364 2077,4364 2033,4320 2033,3710.84 P15.1 2009.68,3547.52 2720.52,3547.52 2763,3590 2763,3643 2734.54,3671.46 2691.16,3671.46 2662.62,3700 2662.62,3760 2674.62,3772 2839,3772 2943,3668 3080,3668 3200,3548 3246,3548 3278,3580 3278,3640 3246.54,3671.46 3200,3671.46 3177.91,3693.55 3177.91,3875.39 3323.82,4021.3 R17.1
NetR9_1: R9.1 T1.3 | length 372.7
  Top Layer w10: T1.3 3869.96,3589.57 3913.27,3546.26 4017.11,3546.26 4078.74,3607.89 R9.1
NetR12_1: R12.1 T3.3 | length 150.6
  Top Layer w10: T3.3 2835.11,4126.63 R12.1@2869.48,4126.63
NetR20_2: R20.2 R26.1 U1.6 | length 1082.5
  Top Layer w10: R20.2 3107.34,4553.35 3204.34,4650.34 R26.1 3283.98,4651 v1(3357,4651) ; U1.6 3857,4461.61 3857,4605 3837,4625
  Bottom Layer w10: v1(3357,4651) 3589,4651 3615,4625 3837,4625
NetR22_2: R22.2 R25.2 U1.5 | length 1576.3
  Top Layer w10: R22.2 3042.88,4468.5 v1@3080,4505.63 ; v1(3067,4499) 3067,4708.05 3090,4731.05 R25.2 ; v1(3768,4199) 3768,4475.2 3780,4487.2 U1.5
  Bottom Layer w10: v1(3067,4499) 3099,4467 3118.63,4467 ; v1@3080,4505.63 3118.63,4467 ; v1(3768,4199) 3655,4199 3387,4467 3118.63,4467
NetR26_2: R26.2 Rs1.1 U1.7 | length 3435.5
  Top Layer w10: R26.2 3283.98,4777.98 ; 3301,4863.01 3283.98,4845.98 3283.98,4777.98 ; U1.7 3864,4436.02 3900.02,4400 4083,4400 4103,4420 v1(4103,4667) ; v1(3975,4795) 3301,4795 3283.98,4777.98 ; v1(5030,4680) 5057.39,4707.39 Rs1.1
  Bottom Layer w10: 3301,4863.01 4846.99,4863.01 v1(5030,4680) ; v1(3975,4795) v1(4103,4667)
NetR27_1: R27.1 Rs2.1 U1.8 | length 2902.4
  Top Layer w10: v1(3402,4598) 3402,4650.34 R27.1 ; v1(3904,4601) v1(3904,4464.31) 3932.29,4436.02 U1.8 ; Rs2.1 5152.74,4685 5121,4653.26 5121,4400 5145,4376 5220,4376 5274,4322 v1(5274,4271)
  Bottom Layer w10: v1(3402,4598) 3405,4601 v1(3904,4601) ; v1(3904,4464.31) 4097.31,4271 v1(5274,4271)
NetR27_2: R27.2 R30.2 U1.9 | length 1168.7
  Top Layer w10: R27.2 3442.18,4760 3453.18,4771 3656,4771 3747,4680 ; R30.2 3529.34,4480 3547,4480 3747,4680 ; U1.9 3971.39,4461.61 3953,4480 3953,4642 3915,4680 3747,4680
NetR28_2: R28.2 R29.2 U1.10 | length 2561.7
  Top Layer w10: v1(3200,4513) 3212.84,4500.16 R29.2 ; v1(3524,4731) R28.2 R28.2 ; v1(3900,4728) 3974,4654 3974,4496 3982.8,4487.2 U1.10
  Bottom Layer w10: v1(3200,4513) 3240,4553 3240,4629 3200,4669 2878,4669 2847,4700 2847,4760 2896,4809 3819,4809 v1(3900,4728) 3524,4728 v1(3524,4731)
NetRg1_1: Rg1.1 Rg2.2 U3.2 | length 1659.8
  Top Layer w10: Rg2.2 4880.86,4750.14 4891,4740 4891,4650.55 4818,4577.55 4818,4361 5017.54,4161.46 5240,4161.46 5314,4235.46 5314,4325.05 5240,4399.05 5215.51,4399.05 U3.2 5329.72,4567.13 Rg1.1
NetRg3_1: Rg3.1 Rg4.2 U3.6 | length 1952.6
  Top Layer w10: Rg3.1 5220,4723.43 5200,4743.43 5200,4793.36 5180,4813.36 5063.22,4813.36 5000,4750.14 Rg4.2 4962.04,4782 5009.65,4829.61 5717.39,4829.61 5807,4740 5807,4460 5672.98,4325.98 U3.6
RX_I: C22.N J3.1 | length 800.7
  Top Layer w10: v1(5719,4532) 5767.72,4580.72 C22.N
  Bottom Layer w10: v1(5719,4532) 5719,4465 5772,4412 6156,4412 6174.1,4393.9 J3.1
RX_Q: C8.N J3.3 | length 670.2
  Bottom Layer w10: C8.N 5805.11,4438 6178,4438 6179,4439 6235,4439 6267.93,4471.93 6267.93,4549.4 J3.3
RX_SIG: J1.1 J1.2 Q1.1 | length 1565
  Top Layer w10: J1.1 1336,4456.72 1336,4556.72 ; J1.2 1336,4556.72 ; Q1.1 1599,4176 1714,4176 1738,4200 1738,4640 1560,4818 1394,4818 1336,4760 1336,4556.72
TXEN: J2.1 Q1.2 | length 4335.7
  Bottom Layer w10: Q1.2 1621.06,3987.94 1733,3876 1733,3801 1704,3772 1660,3772 1632,3744 1632,3696 1660,3668 1767,3668 1948,3487 4799,3487 4829,3457 5174.52,3457 J2.1
pads on no net: T1.1 T1.6 T2.1 T2.6 T3.1 T3.6 T4.1 T4.6 U1.1 U1.2 U1.3 U1.12 U1.13 U1.14

## Text inside footprints (layer, text, board x,y; h text height)
P1: Mechanical 13 "TAB" at 4309.53,3879.48 h25 r90
P2: Mechanical 13 "TAB" at 5854.75,3879.48 h25 r90
P3: Mechanical 13 "TAB" at 5338.16,3879.48 h25 r90
P4: Mechanical 13 "TAB" at 6113.05,3879.48 h25 r90
P5: Mechanical 13 "TAB" at 5596.45,3879.48 h25 r90
P6: Mechanical 13 "TAB" at 5079.86,3879.48 h25 r90
P7: Mechanical 13 "TAB" at 4821.56,3879.48 h25 r90
P8: Mechanical 13 "TAB" at 4563.26,3879.48 h25 r90
P9: Mechanical 13 "TAB" at 1370.39,3702.71 h25 r90
P10: Mechanical 13 "TAB" at 2916.26,3702.71 h25 r90
P11: Mechanical 13 "TAB" at 2400.97,3702.71 h25 r90
P12: Mechanical 13 "TAB" at 3173.91,3702.71 h25 r90
P13: Mechanical 13 "TAB" at 2658.62,3702.71 h25 r90
P14: Mechanical 13 "TAB" at 2143.33,3702.71 h25 r90
P15: Mechanical 13 "TAB" at 1885.68,3702.71 h25 r90
P16: Mechanical 13 "TAB" at 1628.04,3702.71 h25 r90
U1: Top Overlay "*" at 3789.82,4598.57 h50; Mechanical 13 "*" at 3841.32,4560.3 h50